# Altium PCB ValdisPCB.PcbDoc
Units mm, origin at the board's own origin, x right, y up, seen from the top; angles counter-clockwise.
Board outline 50 x 42.5 mm, 4 copper layers (Top Layer, GND top, GND bottom, Bottom Layer), stack 0.603 mm thick; 89 components, 68 nets, 308 pads, 111 vias.
Unrouted connection lines stored in the file: 12.
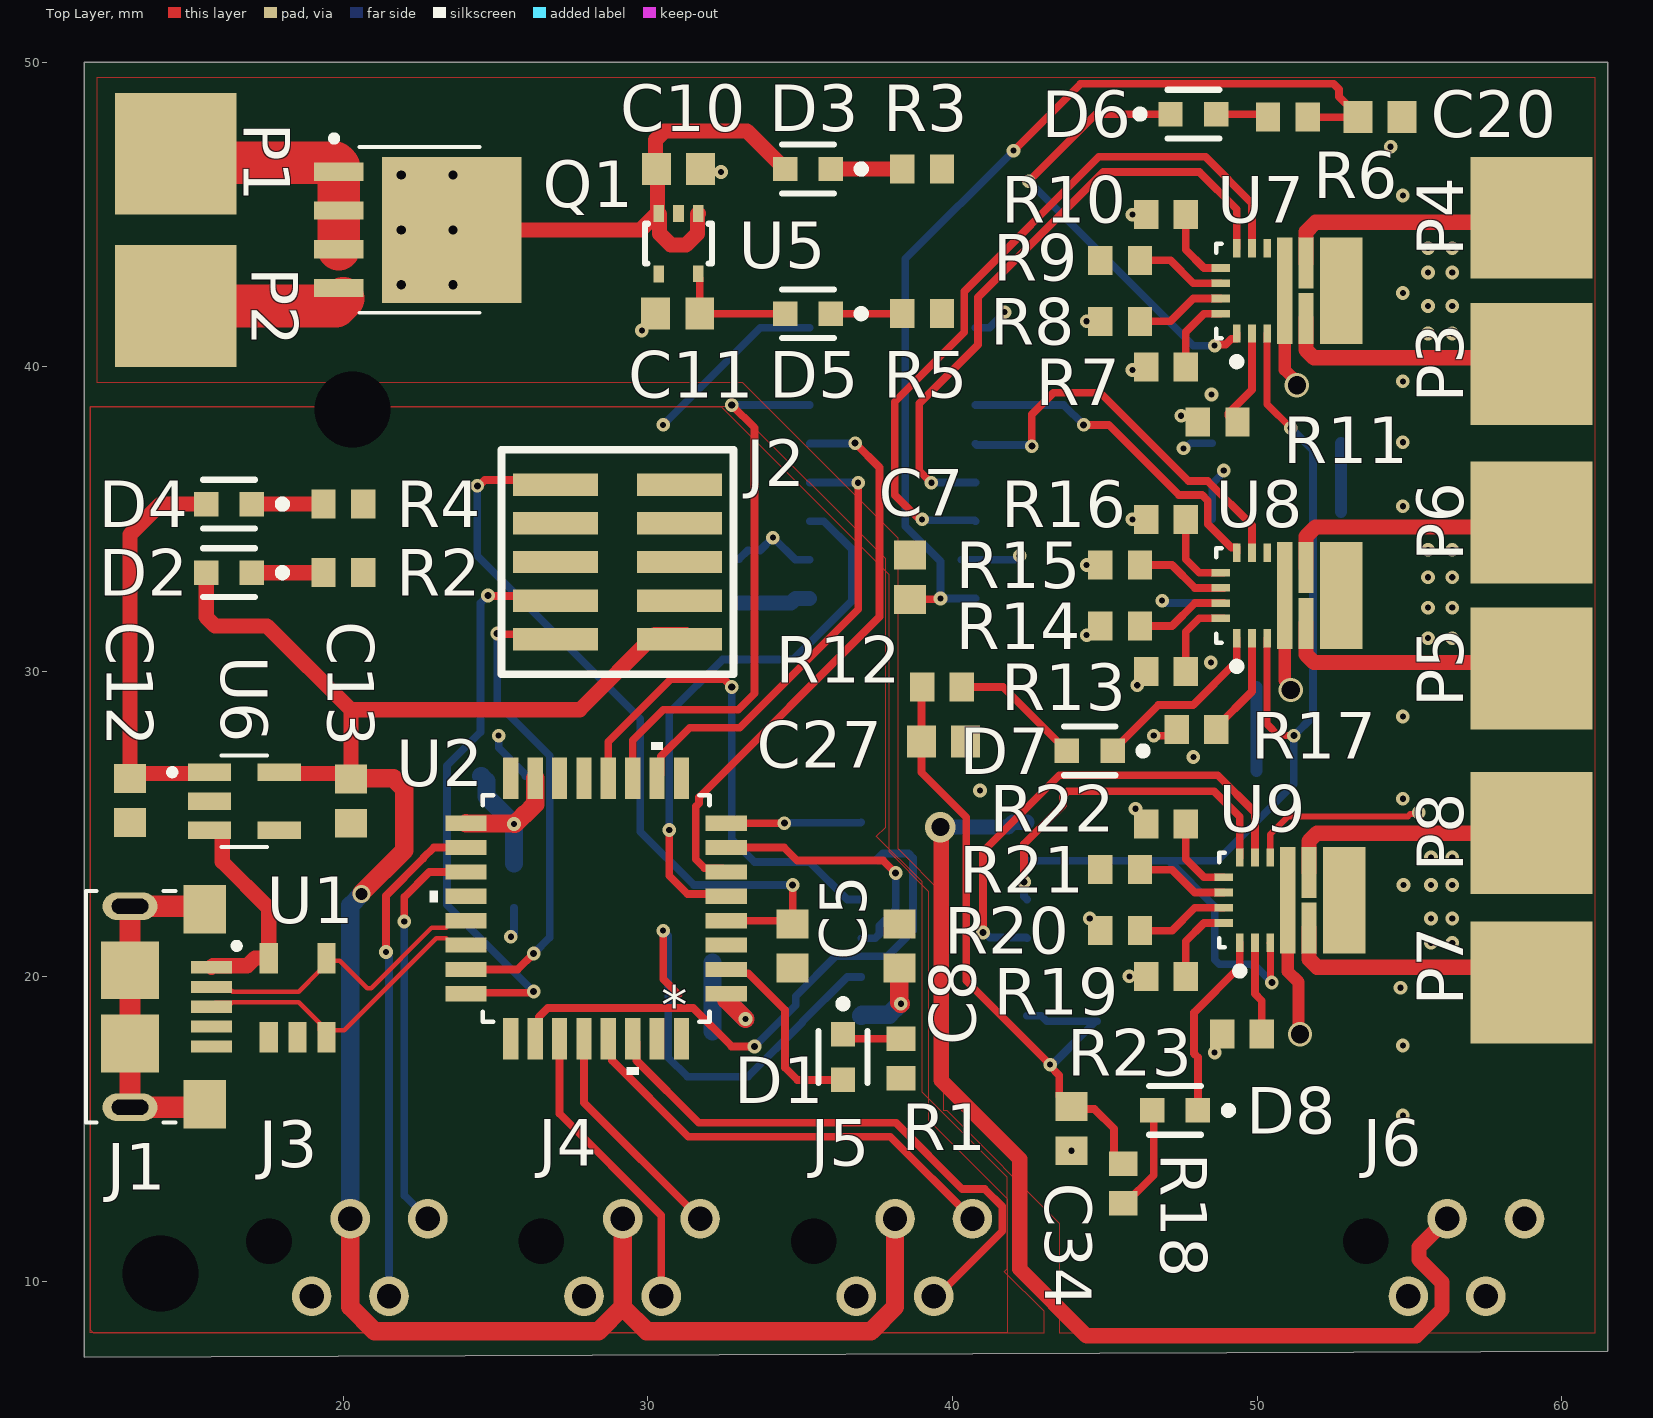
[diagram p0: Top Layer view]
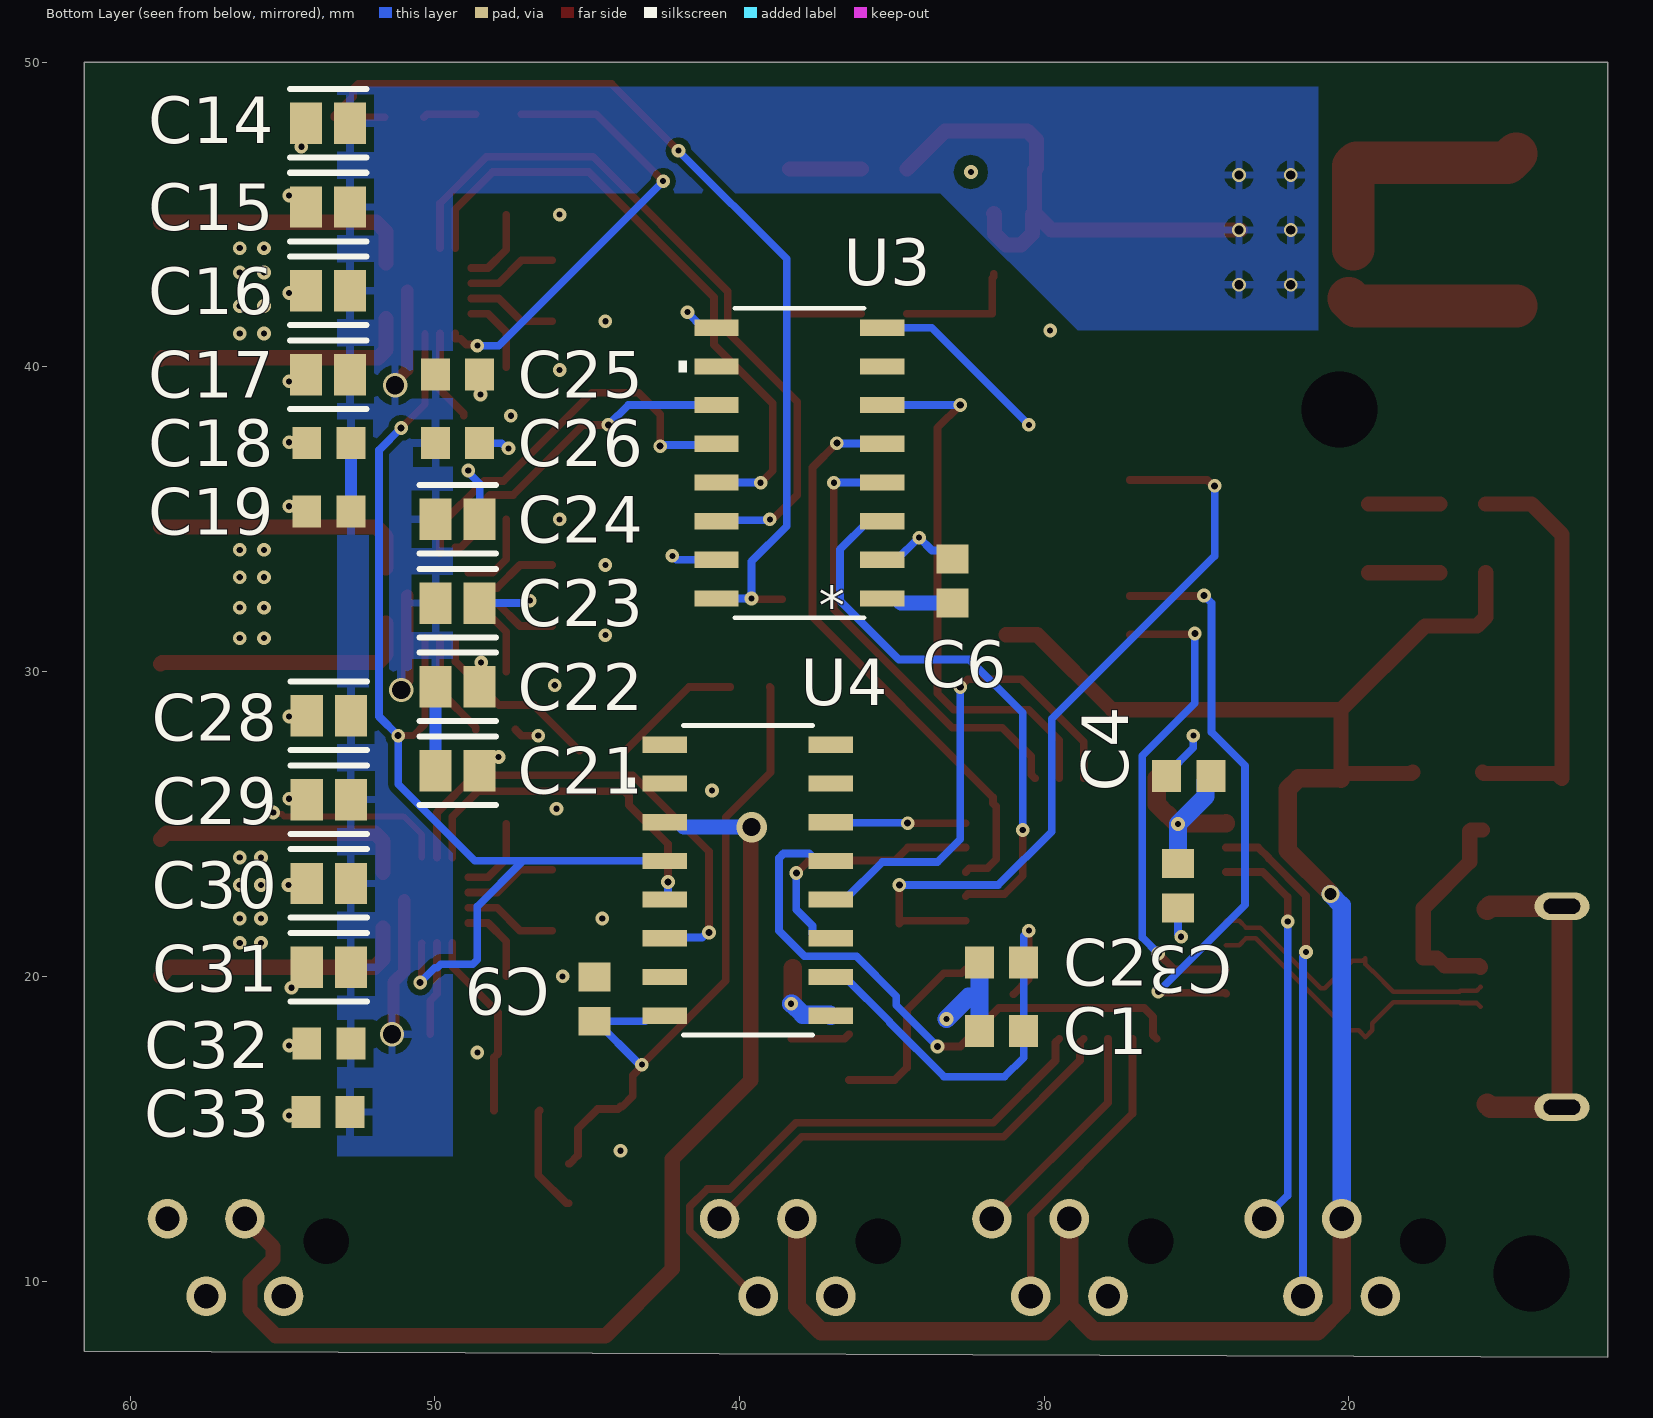
[diagram p1: Bottom Layer view, seen from below]
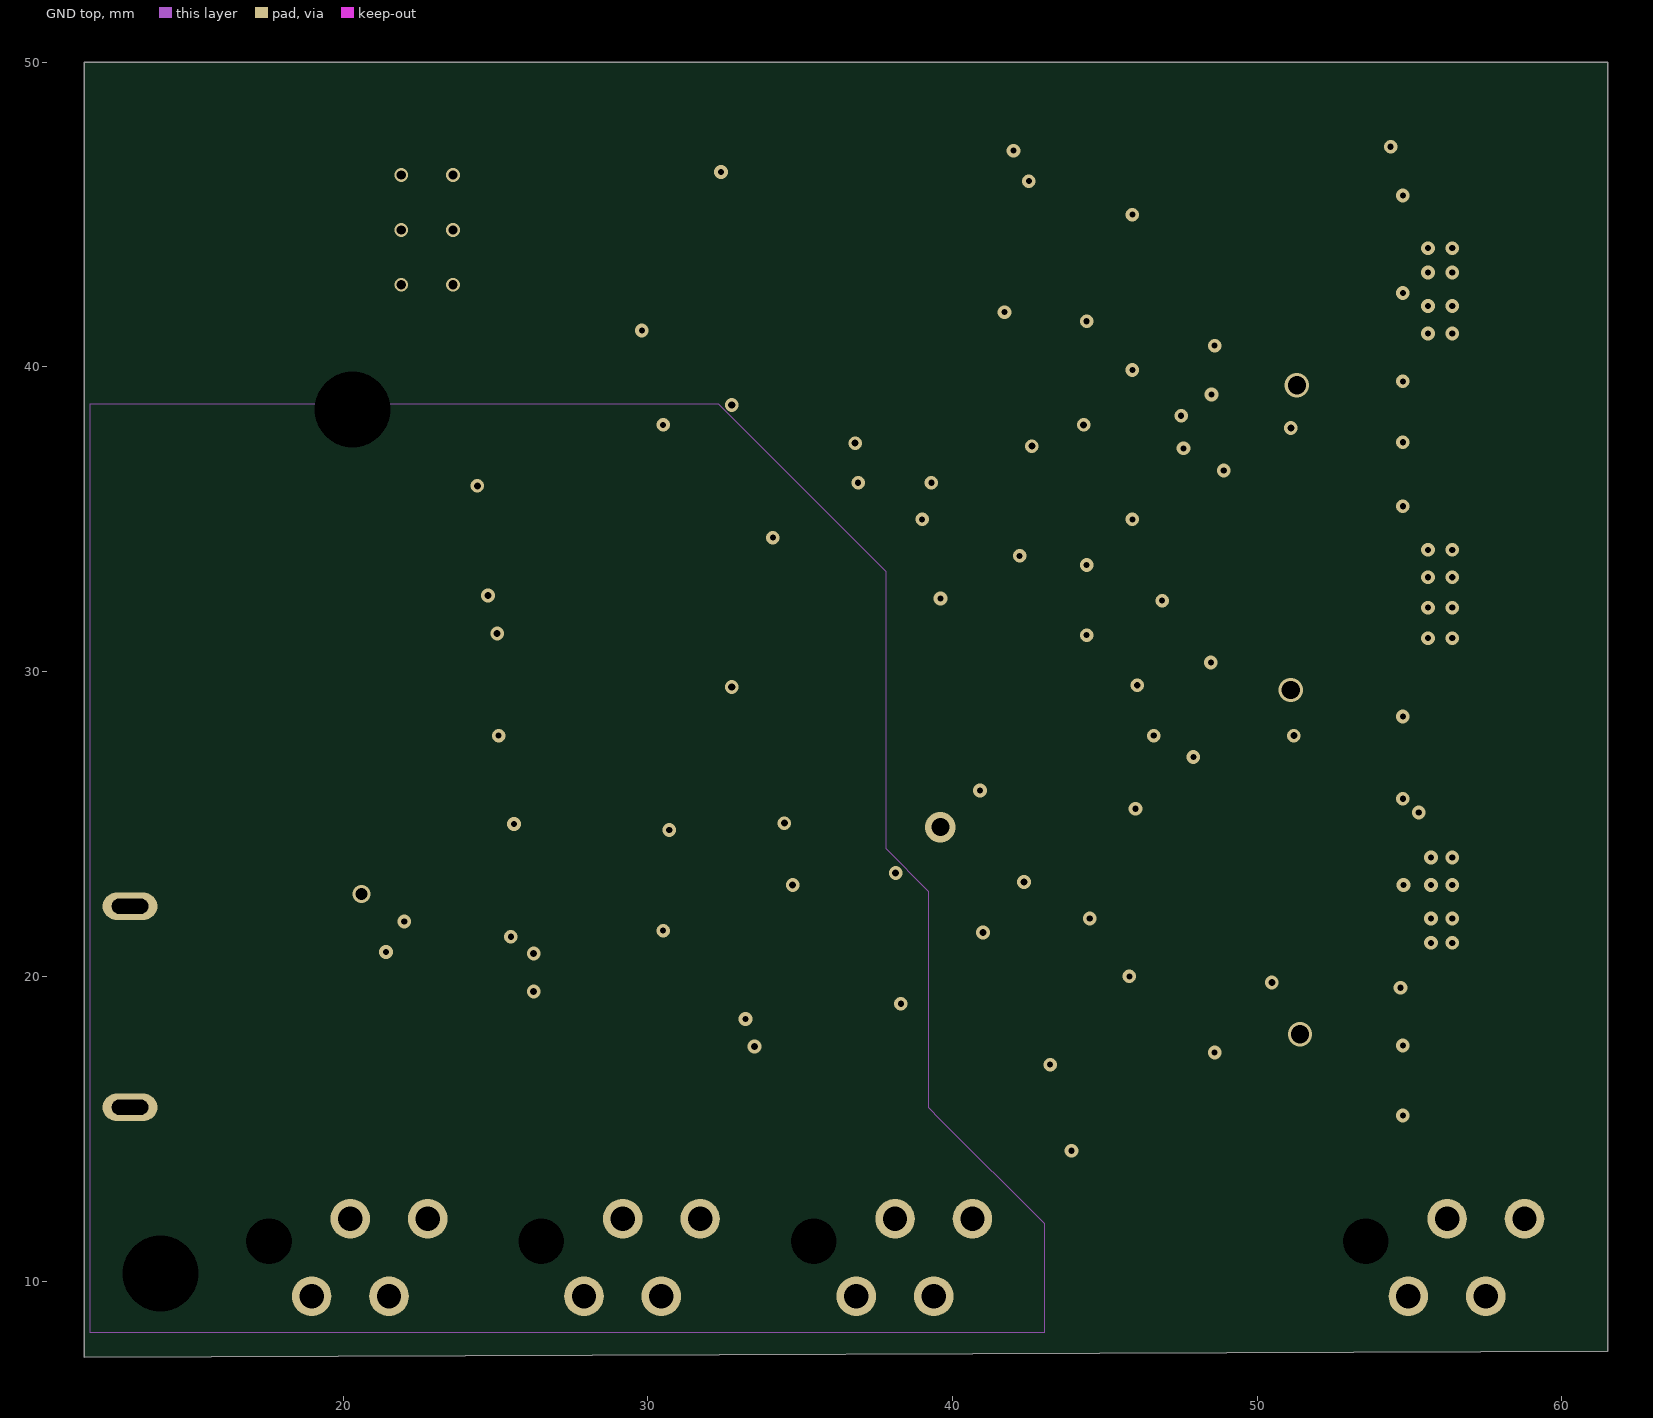
[diagram p2: GND top]
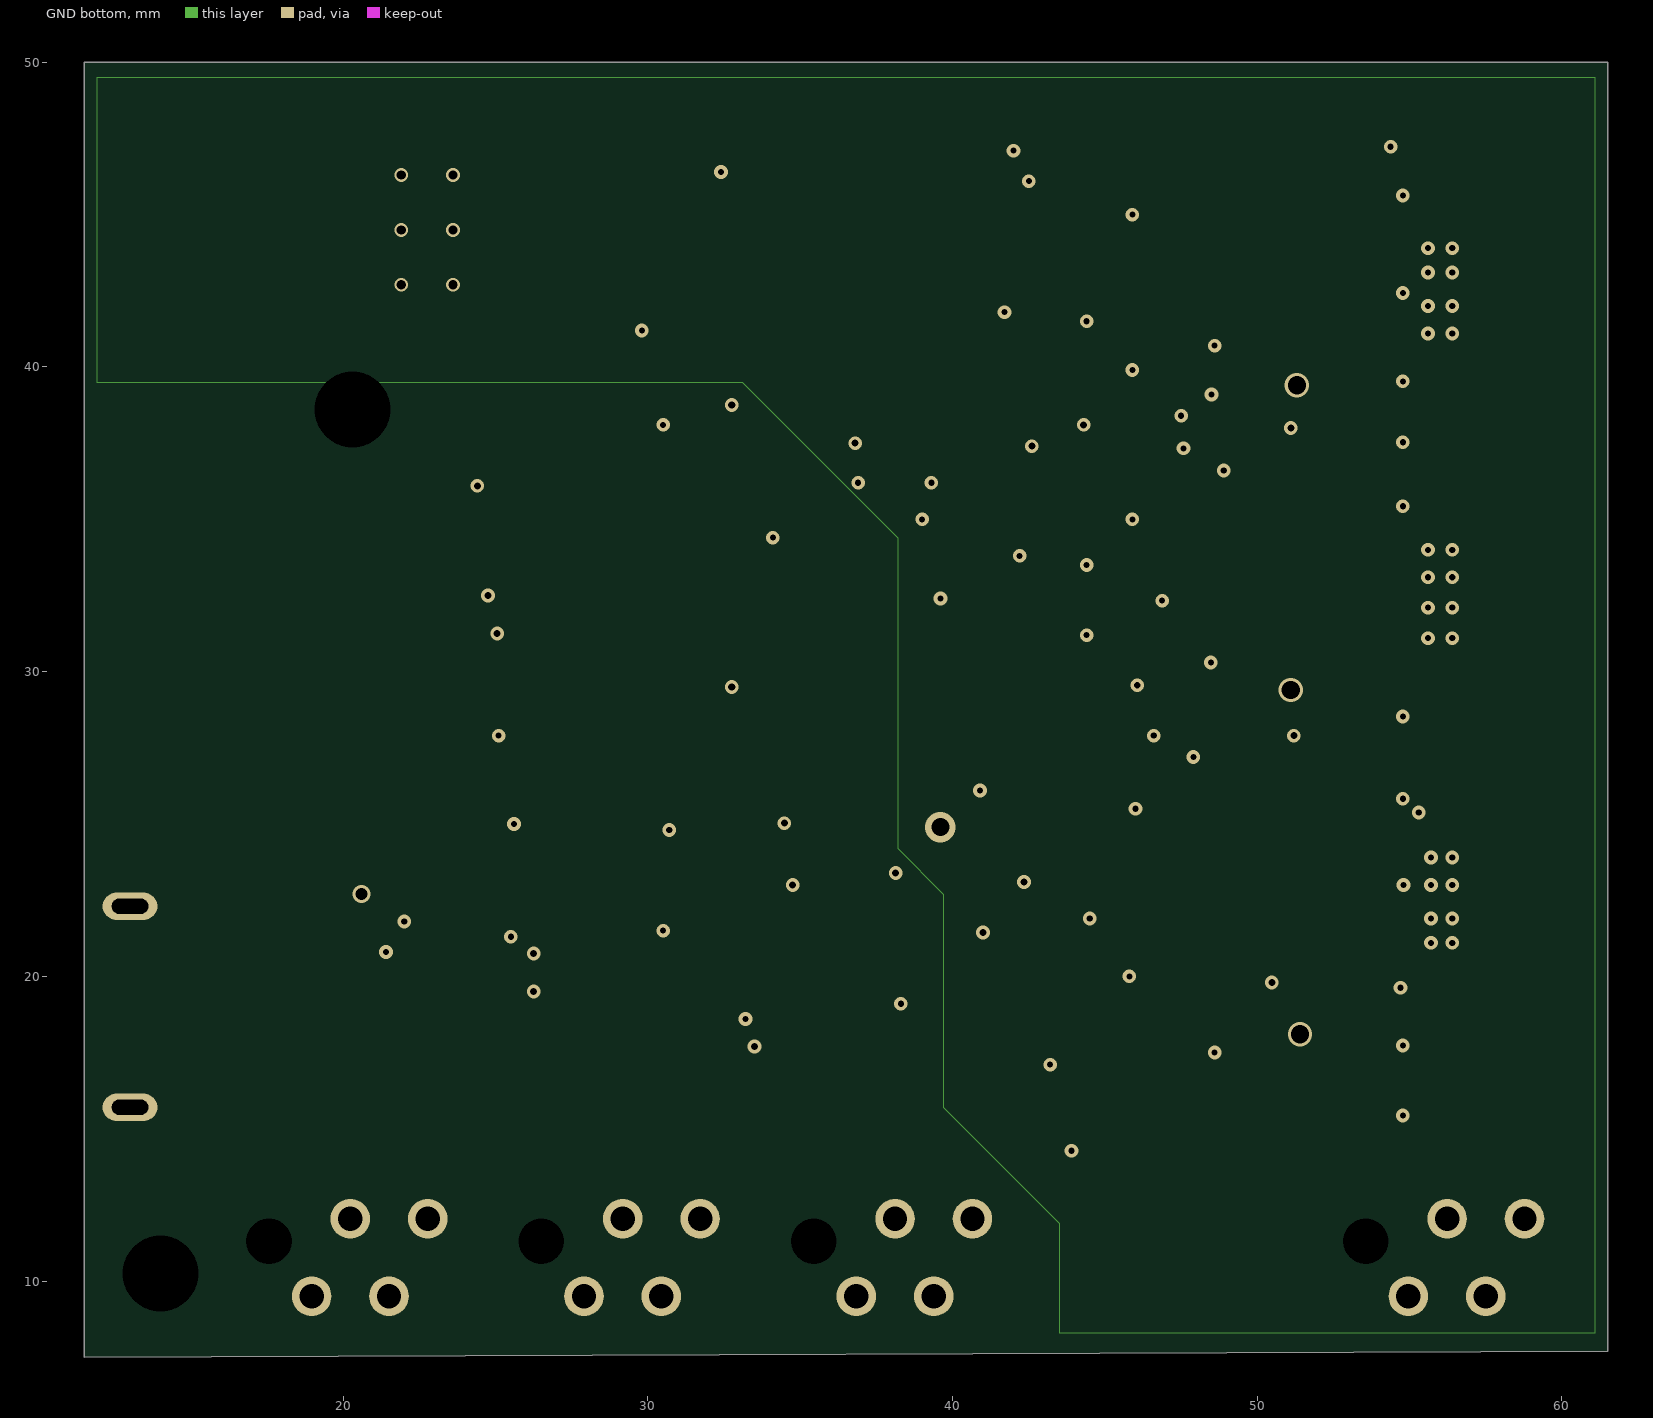
[diagram p3: GND bottom]
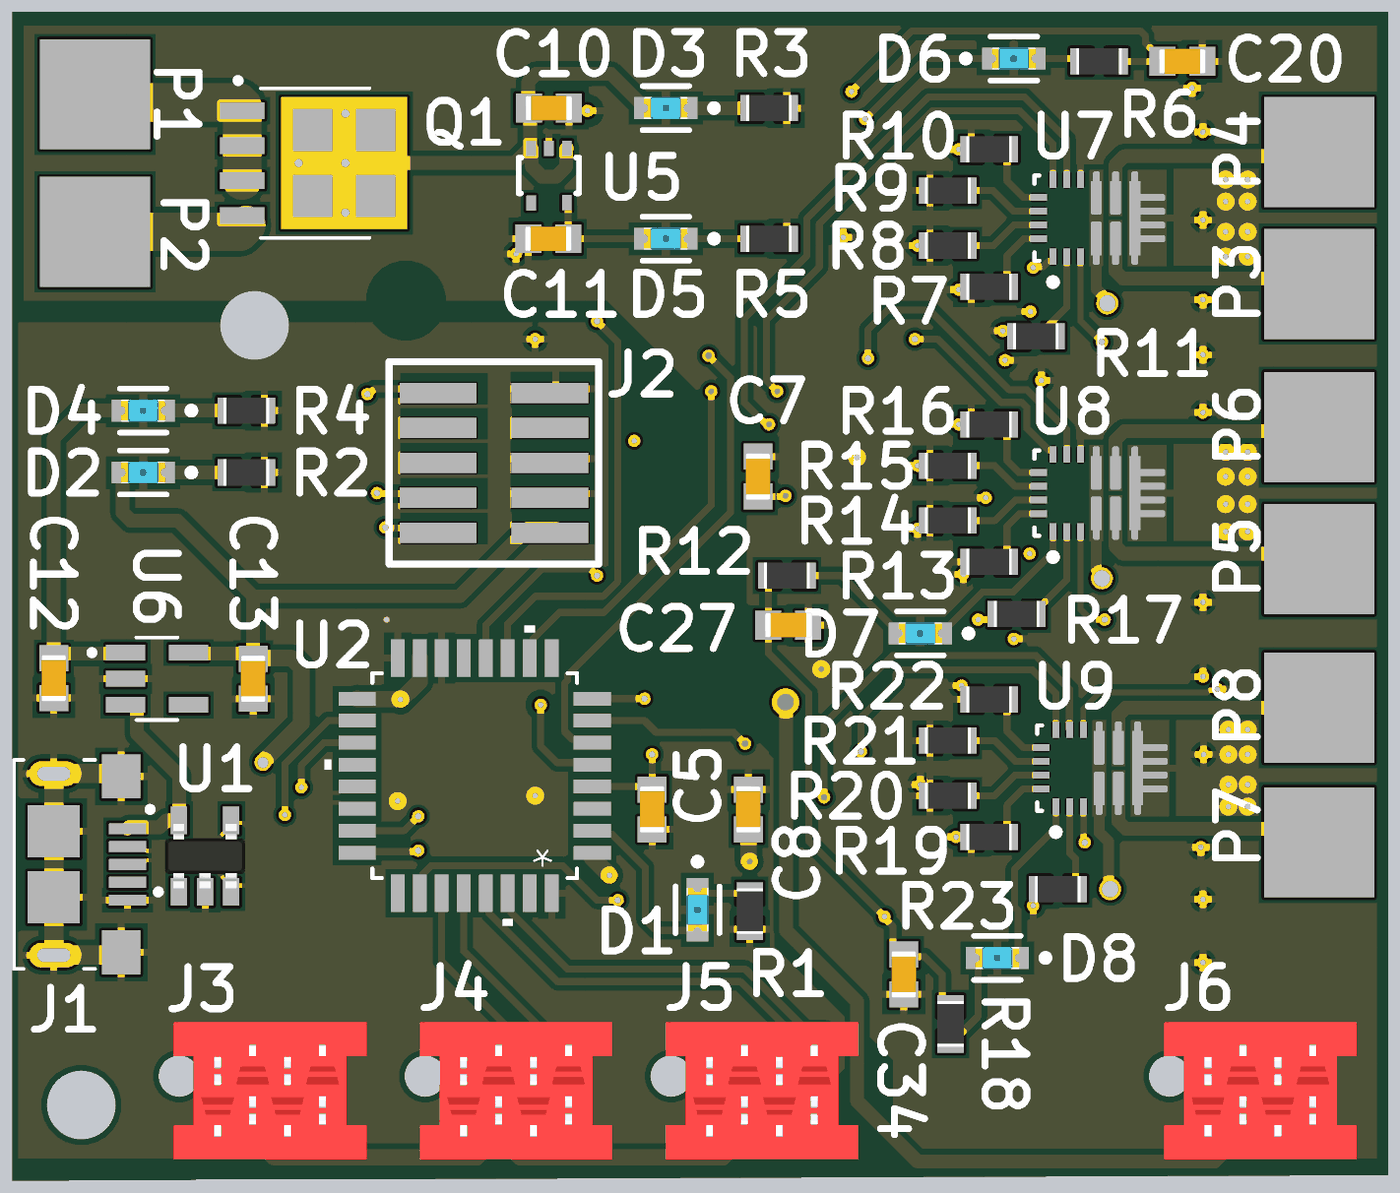
[diagram p4: 3D render of the assembled board from above, using the file's embedded part models]
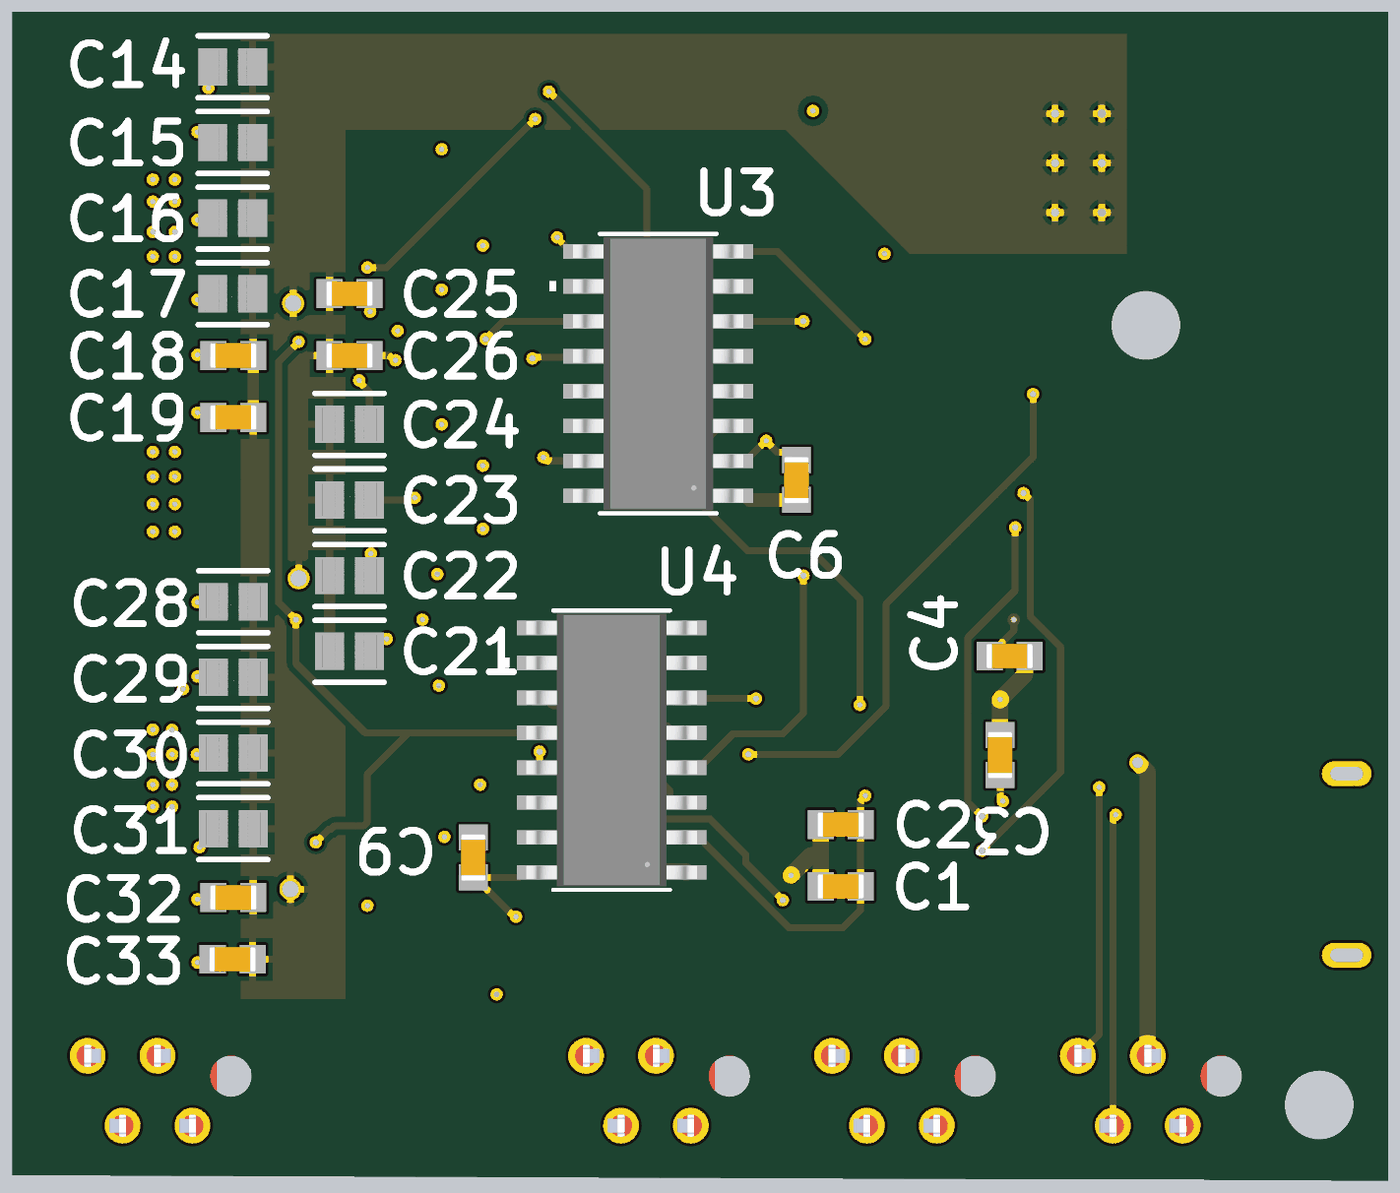
[diagram p5: 3D render of the assembled board from below, using the file's embedded part models]

## Layer stack, top to bottom
Top Solder: solder mask 0.0102, Solder Resist, Dk 3.5
Top Layer: signal copper 0.0356
Dielectric 2: prepreg 0.0711, PP-006, Dk 4.1
GND top: signal copper 0.035
Dielectric 1: dielectric 0.32, FR-4, Dk 4.8
GND bottom: signal copper 0.035
Dielectric 3: prepreg 0.0711, PP-006, Dk 4.1
Bottom Layer: signal copper 0.0356
Bottom Solder: solder mask 0.0102, Solder Resist, Dk 3.5

## Board outline
11.5,7.5 61.5,7.702 61.5,50 11.5,50

## Design rules (kind name [scope] priority, off if disabled: settings)
Clearance [All] p1: gap=0.2 ignorepadtopadclearanceinfootprint=TRUE
DiffPairsRouting "Schematic Differential Pairs Routing" [InDifferentialPairClass('USBA')] p1: maxlimit=0.2 minlimit=0.2 mostfreqgap=0.2 toplayer_minwidth=0.15 toplayer_maxwidth=0.15 toplayer_prefwidth=0.15 midlayer1_minwidth=0.15 midlayer1_maxwidth=0.15 midlayer1_prefwidth=0.15 midlayer2_minwidth=0.15 midlayer2_maxwidth=0.15 midlayer2_prefwidth=0.15 bottomlayer_minwidth=0.15 bottomlayer_maxwidth=0.15 bottomlayer_prefwidth=0.15 maxuncoupledlength=12.7
DiffPairsRouting [All] p2: maxlimit=0.254 minlimit=0.254 mostfreqgap=0.254 toplayer_minwidth=0.381 toplayer_maxwidth=0.381 toplayer_prefwidth=0.381 midlayer1_minwidth=0.381 midlayer1_maxwidth=0.381 midlayer1_prefwidth=0.381 midlayer2_minwidth=0.381 midlayer2_maxwidth=0.381 midlayer2_prefwidth=0.381 bottomlayer_minwidth=0.381 bottomlayer_maxwidth=0.381 bottomlayer_prefwidth=0.381 maxuncoupledlength=12.7
PolygonConnect [All] p1: connectstyle=Relief reliefconductorwidth=0.254 reliefentries=4 polygonreliefangle="90 Angle" airgapwidth=0.254
RoutingVias [All] p1: holewidth=0.711 width=1.27 viastyle="Through Hole" minholewidth=0.2 minwidth=0.3 maxholewidth=6.3 maxwidth=6.4
SolderMaskExpansion [All] p1: expansion=0.102 istentingtop=FALSE
Width [All] p1: maxlimit=2 minlimit=0.09 preferedwidth=0.254
29 further rules are at their usual default settings.

## Classes and differential pairs
differential pair class USBA: USB
component class MCU_3: C28 C29 C30 C31 C32 C33 C34 D8 R18 R19 R20 R21 R22 R23 U9
component class MCU_2: C21 C22 C23 C24 C25 C26 C27 D7 R12 R13 R14 R15 R16 R17 U8
component class MCU_1: C14 C15 C16 C17 C18 C19 C20 D6 R6 R7 R8 R9 R10 R11 U7
component class mainboard_valdis: C1 C2 C3 C4 C5 C6 C7 C8 C9 C10 C11 C12 C13 D1 D2 D3 D4 D5 J1 J2 J3 J4 J5 J6 P1 P2 P3 P4 P5 P6 P7 P8 Q1 R1 R2 R3 R4 R5 U1 U2 U3 U4 U5 U6
differential pair USB: +USB_P -USB_N

## Components (designator, comment, footprint, x,y, rotation, side; value= is the part's Value field where it differs from the comment)
C1 "4.7uF" CAPC1608X90X35ML10T15 31.394,18.201 r0 bottom
C2 "100nF" CAPC1608X90X35ML10T15 31.394,20.451 r0 bottom
C3 "100nF" CAPC1608X90X35ML10T15 25.6,22.975 r90 bottom
C4 "100nF" CAPC1608X90X35ML10T15 25.25,26.574 r180 bottom
C5 "100nF" CAPC1608X90X35ML10T15 34.75,21 r90 top
C6 "100nF" CAPC1608X90X35ML10T15 33,32.975 r270 bottom
C7 "100nF" CAPC1608X90X35ML10T15 38.6,33.1 r270 top
C8 "100nF" CAPC1608X90X35ML10T15 38.25,21 r270 top
C9 "100nF" CAPC1608X90X35ML10T15 44.75,19.25 r270 bottom
C10 "1uF" CAPC1608X90X35ML10T15 31,46.5 r180 top
C11 "1uF" CAPC1608X90X35ML10T15 30.975,41.75 r0 top
C12 "1uF" CAPC1608X90X35ML10T15 13,25.775 r90 top
C13 "1uF" CAPC1608X90X35ML10T15 20.25,25.75 r90 top
C14 "100uF" FP-CL21-IPC_C 53.5,48 r0 bottom
C15 "100uF" FP-CL21-IPC_C 53.5,45.25 r0 bottom
C16 "100uF" FP-CL21-IPC_C 53.5,42.5 r0 bottom
C17 "100uF" FP-CL21-IPC_C 53.5,39.75 r0 bottom
C18 "4.7uF" CAPC1608X90X35ML10T15 53.475,37.5 r180 bottom
C19 "100nF" CAPC1608X90X35ML10T15 53.475,35.25 r180 bottom
C20 "100nF" CAPC1608X90X35ML10T15 54.025,48.2 r180 top
C21 "100uF" FP-CL21-IPC_C 49.25,26.75 r180 bottom
C22 "100uF" FP-CL21-IPC_C 49.25,29.5 r180 bottom
C23 "100uF" FP-CL21-IPC_C 49.25,32.25 r180 bottom
C24 "100uF" FP-CL21-IPC_C 49.25,35 r180 bottom
C25 "4.7uF" CAPC1608X90X35ML10T15 49.25,39.75 r0 bottom
C26 "100nF" CAPC1608X90X35ML10T15 49.25,37.5 r0 bottom
C27 "100nF" CAPC1608X90X35ML10T15 39.7,27.7 r180 top
C28 "100uF" FP-CL21-IPC_C 53.475,28.55 r0 bottom
C29 "100uF" FP-CL21-IPC_C 53.475,25.8 r0 bottom
C30 "100uF" FP-CL21-IPC_C 53.475,23.05 r0 bottom
C31 "100uF" FP-CL21-IPC_C 53.475,20.3 r0 bottom
C32 "4.7uF" CAPC1608X90X35ML10T15 53.475,17.8 r180 bottom
C33 "100nF" CAPC1608X90X35ML10T15 53.5,15.55 r180 bottom
C34 "100nF" CAPC1608X90X35ML10T15 43.9,15 r90 top
D1 "LTST-C191TBKT" FP-LTST-C191TBKT-MFG 36.4,17.35 r270 top
D2 "LTST-C191TBKT" FP-LTST-C191TBKT-MFG 16.25,33.25 r180 top
D3 "LTST-C191TBKT" FP-LTST-C191TBKT-MFG 35.25,46.5 r180 top
D4 "LTST-C191TBKT" FP-LTST-C191TBKT-MFG 16.25,35.5 r180 top
D5 "LTST-C191TBKT" FP-LTST-C191TBKT-MFG 35.25,41.75 r180 top
D6 "LTST-C191TBKT" FP-LTST-C191TBKT-MFG 47.9,48.3 r0 top
D7 "LTST-C191TBKT" FP-LTST-C191TBKT-MFG 44.5,27.4 r180 top
D8 "LTST-C191TBKT" FP-LTST-C191TBKT-MFG 47.3,15.6 r180 top
J1 "10118193-0001LF" FCI_10118193-0001LF 13,19 r270 top
J2 "FTSH-105-01-L-DV-K" FTSH-105-01-XXX-DV-K 29,33.6 r90 top
J3 "microMatch4" microMatch4 18.96,9.5 r180 top
J4 "microMatch4" microMatch4 27.9,9.5 r180 top
J5 "microMatch4" microMatch4 36.84,9.5 r180 top
J6 "microMatch4" microMatch4 54.96,9.5 r180 top
P1 "BAT+" PCBComponent_1 14.5,47 r0 top
P2 "BAT-" PCBComponent_1 14.5,42 r0 top
P3 "M1+" PCBComponent_1 59,40.1 r0 top
P4 "M1-" PCBComponent_1 59,44.9 r0 top
P5 "M2+" PCBComponent_1 59,30.1 r0 top
P6 "M2-" PCBComponent_1 59,34.9 r0 top
P7 "M3+" PCBComponent_1 59,19.8 r0 top
P8 "M3-" PCBComponent_1 59,24.7 r0 top
Q1 "BUK6Y10-30PX" TO127P600X120-5N 22.5,44.5 r270 top
R1 "1K" RESC1609X50X30NL8T20 38.3,17.3 r90 top
R2 "1K" RESC1609X50X30NL8T20 20,33.25 r180 top
R3 "1K" RESC1609X50X30NL8T20 39,46.5 r180 top
R4 "1K" RESC1609X50X30NL8T20 20,35.5 r180 top
R5 "1K" RESC1609X50X30NL8T20 39,41.75 r180 top
R6 "1K" RESC1609X50X30NL8T20 51,48.2 r0 top
R7 "0" RESC1609X50X30NL8T20 47,40 r0 top
R8 "4K7" RESC1609X50X30NL8T20 45.5,41.5 r0 top
R9 "0" RESC1609X50X30NL8T20 45.5,43.5 r0 top
R10 "0" RESC1609X50X30NL8T20 47,45 r0 top
R11 "2K2" RESC1609X50X30NL8T20 48.7,38.2 r0 top
R12 "1K" RESC1609X50X30NL8T20 39.65,29.5 r180 top
R13 "0" RESC1609X50X30NL8T20 47,30 r0 top
R14 "4K7" RESC1609X50X30NL8T20 45.5,31.5 r0 top
R15 "0" RESC1609X50X30NL8T20 45.5,33.5 r0 top
R16 "0" RESC1609X50X30NL8T20 47,35 r0 top
R17 "2K2" RESC1609X50X30NL8T20 48,28.1 r0 top
R18 "1K" RESC1609X50X30NL8T20 45.6,13.2 r90 top
R19 "0" RESC1609X50X30NL8T20 47,20 r0 top
R20 "4K7" RESC1609X50X30NL8T20 45.5,21.5 r0 top
R21 "0" RESC1609X50X30NL8T20 45.5,23.5 r0 top
R22 "0" RESC1609X50X30NL8T20 47,25 r0 top
R23 "2K2" RESC1609X50X30NL8T20 49.5,18.1 r0 top
U1 "CM1223" SOT23-5 18.5,18 r0 top
U2 "STM32G441KBT3" LQFP32_7X7_STM 28.3,22.226 r180 top
U3 "MAX14930DASE+" 21-0041_S16+1_MXM 38.028,36.845 r0 bottom
U4 "MAX14930DASE+" 21-0041_S16+1_MXM 39.722,23.155 r0 bottom
U5 "NCV8730ASN500T1G" TSSOP5 31,44 r180 top
U6 "NCP164CSN330T1G" SOP95P275X110-5N 16.75,25.75 r0 top
U7 "PDRV8243HRXYQ1" RXY0014A-MFG 50.95,42.5 r90 top
U8 "PDRV8243HRXYQ1" RXY0014A-MFG 50.95,32.5 r90 top
U9 "PDRV8243HRXYQ1" RXY0014A-MFG 51.05,22.5 r90 top

## Footprints (in the part's own frame and the unit in brackets; to place one, negate y for a bottom-side part, rotate by r counter-clockwise, add the part's x,y. Pads: shape width x height; smd on the part's side, far side on the other; paste and mask are expansions set on the pad)
21-0041_S16+1_MXM [mm]
  rect 1.456x0.533 smd paste+0 mask+0: 1(-2.722,4.445) 2(-2.722,3.175) 3(-2.722,1.905) 4(-2.722,0.635) 5(-2.722,-0.635) 6(-2.722,-1.905) 7(-2.722,-3.175) 8(-2.722,-4.445) 9(2.722,-4.445) 10(2.722,-3.175) 11(2.722,-1.905) 12(2.722,-0.635) 13(2.722,0.635) 14(2.722,1.905) 15(2.722,3.175) 16(2.722,4.445)
  silkscreen extent -2.12,-5.08 3.96,5.08, body extent -3.1,-4.95 3.1,4.95, height 1.76
CAPC1608X90X35ML10T15 [mm] "Chip Capacitor, 2-Leads, Body 1.7x0.9mm, IPC Low Density"
  rect 0.95x1.05 smd: 1(-0.725,0) 2(0.725,0)
  body extent -0.85,-0.45 0.85,0.45, height 0.9
FCI_10118193-0001LF [mm]
  rect 0.4x1.35 smd: 1(-1.3,2.675) 2(-0.65,2.675) 3(0,2.675) 4(0.65,2.675) 5(1.3,2.675)
  rect 1.6x1.4 smd: S1(-3.2,2.45) S2(3.2,2.45)
  rect 1.9x1.9 smd: S3(1.2,0) S4(-1.2,0)
  oval 0.9x1.8 hole 0.5 slot 1.2 at 90 deg: S5(-3.3,0) S6(3.3,0)
  silkscreen extent -3.8,-1.45 3.8,3.6
FP-CL21-IPC_C [mm]
  rect 1.055x1.356 smd paste+0 mask+0: 1(-0.726,0) 2(0.726,0)
  silkscreen extent -1.25,-1.12 1.25,1.12, body extent -1,-0.63 1,0.63, height 1.45
FP-LTST-C191TBKT-MFG [mm]
  rect 0.8x0.8 smd paste+0 mask+0: 1(-0.75,0) 2(0.75,0)
  silkscreen extent -1.87,-0.8 0.85,0.8, body extent -1.25,-0.55 1.25,0.55, height 0.25
FTSH-105-01-XXX-DV-K [mil]
  rect 29x110 smd mask+2: 1(-100,-80) 2(-100,80) 3(-50,-80) 4(-50,80) 5(0,-80) 6(0,80) 7(50,-80) 8(50,80) 9(100,-80) 10(100,80)
  silkscreen extent -145,-150 145,150
LQFP32_7X7_STM [mm]
  rect 1.359x0.501 smd paste+0 mask+0: 1(-4.274,2.8) 2(-4.274,2) 3(-4.274,1.2) 4(-4.274,0.4) 5(-4.274,-0.4) 6(-4.274,-1.2) 7(-4.274,-2) 8(-4.274,-2.8) 17(4.274,-2.8) 18(4.274,-2) 19(4.274,-1.2) 20(4.274,-0.4) 21(4.274,0.4) 22(4.274,1.2) 23(4.274,2) 24(4.274,2.8)
  rect 0.501x1.359 smd paste+0 mask+0: 9(-2.8,-4.274) 10(-2,-4.274) 11(-1.2,-4.274) 12(-0.4,-4.274) 13(0.4,-4.274) 14(1.2,-4.274) 15(2,-4.274) 16(2.8,-4.274) 25(2.8,4.274) 26(2,4.274) 27(1.2,4.274) 28(0.4,4.274) 29(-0.4,4.274) 30(-1.2,4.274) 31(-2,4.274) 32(-2.8,4.274)
  silkscreen extent -3.72,-5.46 5.46,5.46, body extent 0,0 0.25,0.25, height 0.25
microMatch4 [mm]
  round 1.3 hole 0.8: 1(0,0) 2(-1.27,-2.54) 3(-2.54,0) 4(-3.81,-2.54)
  round 0 hole 1.5 unplated: drill(1.4,-1.8)
  body extent -5.41,-3.77 1.6,1.23, height 4
PCBComponent_1 [mm]
  rect 4x4 smd: 1(0,0)
RESC1609X50X30NL8T20 [mm] "Chip Resistor, 2-Leads, Body 1.65x0.95mm, IPC Medium Density"
  rect 0.8x0.95 smd: 1(-0.65,0) 2(0.65,0)
  body extent -0.82,-0.48 0.82,0.48, height 0.5
RXY0014A-MFG [mm]
  rect 0.6x0.25 smd paste+0 mask-0.292: 1(-1.4,1.625) 2(-1.4,1.125) 3(-1.4,0.625) 8(1.4,0.625) 9(1.4,1.125) 10(1.4,1.625)
  rect 3.5x0.5 smd paste-1.737 mask-1.74: 4(0,0.05)
  rect 1.675x0.5 smd paste-0.825 mask-0.826: 5(-0.913,-0.65) 7(0.913,-0.65)
  rect 3.5x1.4 smd paste-1.737 mask-1.74: 6(0,-1.8)
  rect 0.25x0.6 smd paste+0 mask-0.292: 11(0.75,2.15) 12(0.25,2.15) 13(-0.25,2.15) 14(-0.75,2.15)
  silkscreen extent -2.45,1.5 1.55,2.3, body extent 0,0 0.25,0.25, height 0.25
SOP95P275X110-5N [mm]
  rect 1.42x0.58 smd: 1(-1.145,0.95) 2(-1.145,0) 3(-1.145,-0.95) 4(1.145,-0.95) 5(1.145,0.95)
  silkscreen extent -2.46,-1.5 0.75,1.5
SOT23-5 [mm] "SOT143-4 as used in SP0503BAHTG"
  round 0.4 on Top Overlay: 1(-1.7,0)
  rect 0.6x1 smd: 1(-0.95,0) 2(0,0) 3(0.95,0) 4(0.95,2.6) 5(-0.95,2.6)
  body extent -1.46,0.13 1.46,2.47, height 1
TO127P600X120-5N [mm]
  rect 0.6x1.62 smd: 1(-1.905,-2.65) 2(-0.635,-2.65) 3(0.635,-2.65) 4(1.905,-2.65)
  rect 4.8x4.58 smd paste-3: 5(0,1.06)
  silkscreen extent -3.1,-2.9 2.72,1.97
TSSOP5 [mm]
  rect 0.35x0.55 smd: 1(-0.65,-1.04) 2(0,-1.04) 3(0.65,-1.04) 4(0.65,0.95) 5(-0.65,0.94)
  silkscreen extent -1.1,-0.7 1.1,0.6

## Part data
C1 C2 C3 C4 C5 C6 C7 C8 C9 C10 C11 C12 C13 C18 C19 C20 C25 C26 C27 C32 C33 C34: library part CMP-2000-04945-1, "Chip Capacitor, 22 pF, +/- 5%, 50 V, -55 to 125 degC, 0603 (1608 Metric), RoHS, Tape and Reel", Capacitance=22pF, Case Size/Dimension=0603, Dielectric=C0G, MANUFACTURER=Murata, Package Description="2-Pin Surface Mount Device, Body 1.6 x 0.8 mm", Package Reference=603, Rated Voltage=50V, Tolerance (%)=±5%, Datasheet URL=https://datasheet.ciiva.com/11786/0900766b807a1cab-11786398.pdf, Datasheet Version=Jul-06, Manufacturer URL=http://www.murata.com/
C14 C15 C16 C17 C21 C22 C23 C24 C28 C29 C30 C31: library part CMP-13271-003225-1, "CL21 Series 0805 22uF 25V ±20% Tolerance X5R Multilayer Ceramic Chip Capacitor"
D1 D2 D3 D4 D5 D6 D7 D8: library part CMP-22017-000008-1, "LED BLUE CLEAR CHIP SMD", Case Code (Imperial)=0603, Case Code (Metric)=1608, Color=Blue, Forward Current=20mA, Forward Voltage=3.8V, Lens Color=Colorless, Max Operating Temperature=80°C, Max Power Dissipation=75mW, Min Operating Temperature=-20°C, Package Quantity=1, Power Dissipation=76mW, Reverse Voltage=5V, Case/Package=0603, Depth=1.6mm, Dominant Wavelength=475nm, Height=0.55mm, Illumination Color=Blue, Lead Free="Lead Free", Length=0.8mm, Lens Style=Diffused, Lens Transparency=Clear, Luminous Intensity=180mcd, Mount="Surface Mount", Number of Elements=1, Number of LEDs=1, Number of Pins=2, Packaging="Tape and Reel", Radiation Hardening=No, Test Current=20mA, Viewing Angle=130°, Wavelength=468nm, Width=0.8mm
J1: "USB - micro B USB 2.0 Receptacle Connector 5 Position Surface Mount, Right Angle; Through Hole", Package=None, Availability=Unavailable, MF="Amphenol ICC", MP=10118193-0001LF, Price=None, SnapEDA_Link=https://www.snapeda.com/parts/10118193-0001LF/Amphenol%20FCI/view-part/2758989/?ref=snap
P1 P2 P3 P4 P5 P6 P7 P8: library part Pad4x4
R1 R2 R3 R4 R5 R6 R7 R8 R9 R10 R11 R12 R13 R14 R15 R16 R17 R18 R19 R20 R21 R22 R23: library part CMP-2000-03816-5, "Chip Resistor, 0 Ohm, Jumper, 100 mW, -55 to 155 degC, 0603 (1608 Metric), RoHS, Tape and Reel", MANUFACTURER="Vishay Semiconductor", Max Operating Temperature="155 degC", Min Operating Temperature="-55 degC", Package Quantity=5000, Voltage Rating="75 V", ComponentLink1Description="Manufacturer URL", ComponentLink1URL=http://www.vishay.com/, ComponentLink2Description=Datasheet, ComponentLink2URL=http://www.vishay.com/docs/20035/dcrcwe3.pdf, DatasheetVersion=06/2012, Height="0.45 mm", Length="1.55 mm", Mount="Surface Mount", Mounting Technology="Surface Mount", PackageDescription="2-Pin Surface Mount Device, Body 1.575 x 0.85 mm", PackageReference=0603, Packaging="Tape and Reel", Pins=2, REACH SVHC=Unknown, RoHSCompliant=true
U2: "No Description Available", Built_By=EMA_Cory, Copyright="Copyright (C) 2018 Accelerated Designs. All rights reserved", Datasheet=https://www.st.com/resource/en/datasheet/stm32g441kb.pdf, Manufacturer_Part_Number=STM32G441KBT3, RefDes=RefDes, SourceLibrary=Add_to_database_2020-11-05, Type=DEV, Vendor=STMicroelectronics
U7 U8 U9: "No Description Available", Mfr_Name="Texas Instruments", Copyright="Copyright (C) 2022 Ultra Librarian. All rights reserved.", Manufacturer_Part_Number=PDRV8243HRXYQ1, RefDes=RefDes, Type=DEV

## Free pads (board coordinates)
  round 0 hole 2.5 unplated: HOLE(14,10.25) HOLE(20.3,38.6)

## Via types
v1: diameter 0.45, hole 0.2, Top Layer to Bottom Layer, 80 vias
v2: diameter 0.45, hole 0.23, Top Layer to Bottom Layer, 19 vias
v3: diameter 0.45, hole 0.3, Top Layer to Bottom Layer, 6 vias
v4: diameter 0.8, hole 0.6, Top Layer to Bottom Layer, 3 vias
v5: diameter 0.45, hole 0.2, Top Layer to Bottom Layer, tented both sides, 1 vias
v6: diameter 1, hole 0.6, Top Layer to Bottom Layer, 1 vias
v7: diameter 0.6, hole 0.4, Top Layer to Bottom Layer, 1 vias

## Nets (pads, with @x,y where several pads share a name; then routed paths per layer and width w, separated by ;. In a path a pad name is that pad's centre, name@x,y a point inside that pad or via, vN(x,y) a via of type N, cw(c..) or ccw(c..) an arc to the next point about the centre after c; other vN are vias at no path point)
+3.3V: C1.2 C2.2 C3.2 C4.2 C6.2 C8.2 C13.2 D2.2 J2.1 J3.2 J4.2 J5.2 U2.1 U2.15 U2.17 U3.1 U4.1 U6.5 | length 85.3
  Top Layer w0.5: D2.2 15.5,31.793 15.793,31.5 17.5,31.5 20.25,28.75 ; U6.5 17.935,26.66 20.065,26.66 C13.2 20.25,28.75 ; J2.1@31.25,31.21 30.221,31.21 27.761,28.75 20.25,28.75
  Top Layer w0.6: J3.2@20.23,12.229 J3.2 20.23,9.144 21.024,8.35 28.376,8.35 29.17,9.144 ; C13.2 20.275,26.5 21.649,26.5 22,26.149 22,24.13 v7@20.6,22.73 ; U2.17 24.04,25.013 25.587,25.013 v1(25.6,25) 25.627,25 25.927,25.3 25.949,25.3 26.3,25.651 U2.15 ; J4.2 29.17,9.144 ; U2.1@32.574,19.226 v1(33.2,18.6) ; J5.2 38.11,9.144 37.316,8.35 29.964,8.35 29.17,9.144 ; C8.2 38.25,19.15 v1(38.3,19.1)
  Bottom Layer w0.5: C6.2 34.694,32.25 34.844,32.4 U3.1
  Bottom Layer w0.6: J3.2 20.23,22.33 v7(20.6,22.7) ; C4.2 24.7,26.399 24.7,25.9 v1(25.6,25) C3.2 ; C1.2 32.119,19.326 ; C2.2 32.119,19.326 ; v1(33.2,18.6) 32.474,19.326 32.119,19.326 ; U4.1 37.034,18.744 37.917,18.744 38.273,19.1 v1(38.3,19.1)
+5: C7.2 C9.2 C11.2 C20.2 C27.2 C34.2 D5.2 R6.2 R12.2 R18.2 U3.16 U4.16 U5.5 | length 60.8
  Top Layer w0.254: U5.5 31.65,42.96 31.7,42.91 C11.2 D5.2 ; C7.2 39.575,32.375 v1(39.6,32.4) ; R12.2 38.975,29.475 C27.2 38.975,26.695 40.448,25.222 40.448,19.852 v1(43.2,17.1) 43.2,17.047 43.502,16.745 43.502,16.073 43.85,15.725 C34.2 43.982,15.643 44.657,15.643 45.3,15 45.3,14.123 45.573,13.85 R18.2 ; v1(42,47.1) 44.2,49.3 52.5,49.3 52.68,49.12 52.68,48.87 53.3,48.25 C20.2 R6.2
  Bottom Layer w0.254: U3.16 v1(39.6,32.4) 39.6,33.619 38.448,34.771 38.448,43.548 v1(42,47.1) ; U4.16 42.906,18.71 43.091,18.525 C9.2@44.7,18.525 ; v1(43.2,17.1) 43.238,17.138 43.313,17.138 C9.2@44.7,18.525 ; C9.2 C9.2@44.7,18.525
+5VA: C12.2 D4.2 J1.1 U1.5 U6.1 U6.3 | length 20.8
  Top Layer w0.5: D4.2 14,35.5 13,34.5 C12.2 13.16,26.66 15.565,26.66 U6.1 ; U6.3 15.986,24.8 16.026,24.76 16.026,23.76 17.55,22.236 U1.5 17.1,20.6 16.85,20.35 15.725,20.35 J1.1
+16V: C10.2 C14.1 C15.1 C16.1 C17.1 C18.2 C19.2 C21.1 C22.1 C23.1 C24.1 C25.2 C26.2 C28.1 C29.1 C30.1 C31.1 C32.2 C33.2 D3.2 Q1.5 U5.1 U5.3 U7.4 U8.4 U9.4 | length 33.2
  Top Layer w0.4: U8.4 50.9,29.708 51.1,29.508 v4(51.1,29.4) ; U7.4 50.9,39.908 51.3,39.508 v4(51.3,39.4) ; U9.4 51,20.161 51.35,19.811 51.35,18.15 v4(51.4,18.1)
  Top Layer w0.5: Q1.5 29.76,44.5 U5.3@30.3,45.04 ; U5.3@30.312,45.065 30.312,46.463 C10.2 30.25,46.525 30.25,47.457 30.543,47.75 33.25,47.75 D3.2 ; U5.3@30.375,45.015 30.375,44.375 30.75,44 31.25,44 31.625,44.375 31.625,45.015 U5.1
  Bottom Layer w0.4: C21.1 C22.1 ; C19.2 C18.2
  other v3: 21.9,42.7 23.6,42.7 21.9,44.5 23.6,44.5 21.9,46.3 23.6,46.3
GND: C1.1 C2.1 C3.1 C4.1 C5.1 C6.1 C8.1 C12.1 C13.1 J1.5 J1.S1 J1.S2 J1.S3 J1.S4 J1.S5 J1.S6 J2.3 J2.5 J2.9 J3.1 J4.1 J5.1 R1.1 R2.1 R4.1 U1.2 U2.14 U2.16 U2.32 U3.2 U3.8 U4.2 U4.8 U6.2 | length 37.8
  Top Layer w0.254: v1(30.5,21.5) 30.5,19.913 31,19.413
  Top Layer w0.7: J1.S2 15.35,15.7 J1.S6 J1.S3 J1.S4 J1.S5 15.35,22.3 J1.S1
  Bottom Layer w0.254: v5(25.1,27.9) 25.1,27.499 25.975,26.624 C4.1 ; v1(25.5,21.3) 25.6,21.4 C3.1 ; v1(30.5,21.5) 30.669,21.331 C2.1 C1.1 30.669,17.331 31.3,16.7 33.281,16.7 35.064,18.483 35.064,18.506 36.538,19.98 U4.2 ; v1(30.5,38.1) 33.69,41.29 U3.8 ; C6.1 33.278,33.978 33.678,33.978 v1(34.1,34.4) 34.114,34.4 34.844,33.67 U3.2
GNDB: C7.1 C9.1 C10.1 C11.1 C14.2 C15.2 C16.2 C17.2 C18.1 C19.1 C20.1 C21.2 C22.2 C23.2 C24.2 C25.1 C26.1 C27.1 C28.2 C29.2 C30.2 C31.2 C32.1 C33.1 C34.1 J6.1 R3.1 R5.1 R7.1 R8.1 R9.1 R10.1 R11.1 R13.1 R14.1 R15.1 R16.1 R17.1 R19.1 R20.1 R21.1 R22.1 R23.1 U3.9 U3.15 U4.9 U4.15 U5.2 U7.6 U7.8 U8.6 U8.8 U9.6 U9.8 | length 14.4
  Top Layer w0.2: U9.8 50.425,24.657 51.018,25.25 54.94,25.25 55.018,25.327 55.252,25.327 v1(55.3,25.375)
  Top Layer w0.254: v1(46.6,27.9) 47.15,27.9 R17.1
  Bottom Layer w0.254: U3.15@40.288,33.67 U3.15 42.07,33.67 v1(42.2,33.8) ; U3.9 41.212,41.29 41.7,41.778 v1(41.7,41.8) ; v1(46.878,32.33) 46.931,32.33 47.012,32.25 C23.2 ; v1(47.578,37.33) 47.631,37.33 47.801,37.5 C26.1 ; C24.2 48.524,36.171 48.9,36.547 v1(48.9,36.6)
  other v1: 43.9,14.275 54.778,15.43 48.6,17.5 54.778,17.73 54.7,19.625 45.8,20 55.7,21.1 56.4,21.1 44.5,21.9 55.7,21.9 56.4,21.9 54.8,23 55.7,23 56.4,23 55.7,23.9 56.4,23.9 46,25.5 54.778,25.83 40.9,26.1 47.9,27.2 54.778,28.53 46.061,29.553 48.475,30.3 55.6,31.1 56.4,31.1 44.4,31.2 55.6,32.1 56.4,32.1 55.6,33.1 56.4,33.1 44.4,33.5 55.6,34 56.4,34 45.9,35 54.778,35.43 54.778,37.53 47.5,38.4 48.5,39.1 54.778,39.53 45.9,39.9 55.6,41.1 56.4,41.1 29.8,41.2 44.4,41.5 55.6,42 56.4,42 54.778,42.43 55.6,43.1 56.4,43.1 55.6,43.9 56.4,43.9 45.9,45 54.778,45.63 32.4,46.4 54.378,47.23
M1_DIR_A: U2.10 U3.4 | length 15
  Top Layer w0.254: U2.10 30.423,26.623 30.423,27.216 31.368,28.16 33.01,28.16 36.9,32.051 v1(36.9,36.2)
  Bottom Layer w0.254: U3.4 35.311,36.205 36.895,36.205 v1(36.9,36.2)
M1_DIR_B: U3.13 U7.10 | length 20.5
  Top Layer w0.254: v1(39.3,36.2) 38.9,36.6 38.9,38.8 40.831,40.731 40.831,42.289 44.942,46.4 48.1,46.4 49.325,45.175 U7.10
  Bottom Layer w0.254: v1(39.3,36.2) 39.305,36.205 40.745,36.205 U3.13
M1_ENC_A: J3.3 U2.18 | length 16.8
  Top Layer w0.254: J3.3@21.3,9.7 J3.3 ; v1(21.4,20.8) 21.4,22.643 22.627,23.87 22.627,23.887 22.966,24.226 U2.18
  Bottom Layer w0.254: v1(21.4,20.8) 21.4,20.747 21.5,20.647 J3.3
M1_ENC_B: J3.4 U2.19 | length 13.2
  Top Layer w0.254: v1(22,21.8) 22,22.601 22.825,23.426 U2.19
  Bottom Layer w0.254: v1(22,21.8) 22,12.81 J3.4
M1_PWM_A: U2.5 U3.3 | length 18.5
  Top Layer w0.254: v1(30.7,24.8) 30.7,23.3 31.3,22.7 32.5,22.7 U2.5
  Bottom Layer w0.254: v1(30.7,24.8) 30.7,28.651 32.449,30.4 34.763,30.4 36.7,32.337 36.7,34.008 35.768,34.94 U3.3
M1_PWM_B: U3.14 U7.9 | length 24
  Top Layer w0.254: v1(39,35) 38.9,35 38.1,35.8 38.1,38.863 40.377,41.14 40.377,42.477 44.8,46.9 48.3,46.9 49.823,45.377 49.823,43.902 U7.9
  Bottom Layer w0.254: v1(39,35) 39.03,34.97 40.72,34.97 U3.14
M2_DIR_A: U2.11 U3.6 | length 18.2
  Top Layer w0.254: U2.11 29.5,27.75 30.5,28.75 32.957,28.75 33.5,29.293 33.5,38 v2(32.75,38.75)
  Bottom Layer w0.254: v2(32.75,38.75) U3.6
M2_DIR_B: U3.11 U8.10 | length 11.1
  Top Layer w0.254: v2(44.3,38.1) 45.125,38.1 47.423,35.802 47.556,35.802 48.185,35.802 48.377,35.61 48.377,34.981 48.377,34.848 49.152,34.073 49.323,34.073 49.325,34.071 U8.10
  Bottom Layer w0.254: U3.11 43.65,38.75 v2(44.3,38.1)
M2_ENC_A: J4.3 U2.27 | length 9.8
  Top Layer w0.254: U2.27 27.1,15.492 30.44,12.152 J4.3
M2_ENC_B: J4.4 U2.28 | length 7.5
  Top Layer w0.254: U2.28 27.9,15.85 J4.4
M2_PWM_A: U2.6 U3.5 | length 19.2
  Top Layer w0.254: U2.6 32.45,23.55 31.858,23.55 31.567,23.841 31.567,25.575 31.677,25.685 31.677,25.877 37.6,31.8 37.6,36.7 v2(36.8,37.5)
  Bottom Layer w0.254: U3.5 35.316,37.49 36.79,37.49 v2(36.8,37.5)
M2_PWM_B: U3.12 U8.9 | length 13.2
  Top Layer w0.254: v2(42.6,37.4) 42.6,38.442 43.312,39.154 44.846,39.154 47.744,36.256 48.373,36.256 49.825,34.804 U8.9
  Bottom Layer w0.254: U3.12 40.79,37.44 42.56,37.44 v2(42.6,37.4)
M3_DIR_A: U2.12 U4.4 | length 16.3
  Top Layer w0.254: U2.12 28.7,27.7 30.75,29.75 32.5,29.75 v2(32.75,29.5)
  Bottom Layer w0.254: v2(32.75,29.5) 32.75,24.5 33.5,23.75 35.308,23.75 36.538,22.52 U4.4
M3_DIR_B: U4.13 U9.10 | length 11.5
  Top Layer w0.254: v2(42.34,23.099) 42.34,24.34 43.621,25.621 43.621,25.93 43.77,26.079 48.579,26.079 49.425,25.233 U9.10
  Bottom Layer w0.254: v2(42.34,23.099) 42.34,22.624 U4.13
M3_ENC_A: J5.3 U2.30 | length 18.7
  Top Layer w0.254: U2.30 29.623,17.829 29.623,17.237 31.668,15.193 38.139,15.193 40.315,13.017 41.055,13.017 41.627,12.445 41.627,11.635 39.492,9.5 J5.3
M3_ENC_B: J5.4 U2.29 | length 14.7
  Top Layer w0.254: U2.29 28.823,17.829 28.823,17.237 31.322,14.739 37.951,14.739 J5.4
M3_PWM_A: U2.7 U4.3 | length 8.8
  Top Layer w0.254: U2.7 34.474,24.226 34.9,23.8 37.721,23.8 v2(38.131,23.39)
  Bottom Layer w0.254: U4.3 37.462,21.25 37.601,21.389 37.601,21.664 38.131,22.195 v2(38.131,23.39)
M3_PWM_B: U4.14 U9.9 | length 16.1
  Top Layer w0.254: v2(41,21.439) 41,24.1 43.5,26.6 48.7,26.6 49.923,25.377 49.923,23.902 U9.9
  Bottom Layer w0.254: v2(41,21.439) 41.053,21.439 41.217,21.275 42.419,21.275 U4.14
NetD1_1: D1.1 R1.2 | length 2
  Top Layer w0.254: D1.1 36.55,17.95 R1.2
NetD1_2: D1.2 U2.2 | length 6.4
  Top Layer w0.254: U2.2 32.697,20.103 33.289,20.103 34.5,18.892 34.5,17 34.9,16.6 D1.2
NetD2_1: D2.1 R2.2 | length 2.4
  Top Layer w0.5: D2.1 R2.2
NetD3_1: D3.1 R3.2 | length 2.4
  Top Layer w0.5: D3.1 R3.2
NetD4_1: D4.1 R4.2 | length 2.4
  Top Layer w0.5: D4.1 R4.2
NetD5_1: D5.1 R5.2 | length 2.4
  Top Layer w0.254: D5.1 R5.2
NetD6_1: D6.1 U7.1 | length 14.9
  Top Layer w0.254: v1(42.5,46.1) 44.7,48.3 D6.1 ; v1(48.6,40.7) 48.638,40.738 48.963,40.738 49.152,40.927 49.323,40.927 49.325,40.929 U7.1
  Bottom Layer w0.254: v1(42.5,46.1) 47.9,40.7 v1(48.6,40.7)
NetD6_2: D6.2 R6.1 | length 1.7
  Top Layer w0.254: D6.2 50.25,48.3 R6.1
NetD7_1: D7.1 U8.1 | length 6.1
  Top Layer w0.254: D7.1 46.752,28.902 47.889,28.902 49.325,30.338 U8.1
NetD7_2: D7.2 R12.1 | length 4.3
  Top Layer w0.254: R12.1 41.65,29.5 D7.2
NetD8_1: D8.1 U9.1 | length 6.2
  Top Layer w0.254: D8.1 48.05,17.341 47.923,17.468 47.923,18.81 49.425,20.312 U9.1
NetD8_2: D8.2 R18.1 | length 3.5
  Top Layer w0.254: R18.1 45.675,12.55 46.6,13.475 46.6,15.55 D8.2
NetP1_1: P1.1 Q1.1 Q1.2 Q1.3 | length 8.2
  Top Layer w1.4: P1.1 14.797,46.702 19.74,46.702 19.85,46.592 Q1.1 Q1.2 Q1.3
NetP2_1: P2.1 Q1.4 | length 5.6
  Top Layer w1.4: P2.1 19.75,42 20,42.25
NetP3_1: P3.1 U7.5 | length 8.6
  Top Layer w0.5: U7.5 51.6,40.564 51.864,40.3 58.95,40.3 P3.1@59,40.25
NetP4_1: P4.1 U7.7 | length 8.6
  Top Layer w0.5: U7.7 51.6,44.436 51.914,44.75 P4.1@59,44.75
NetP5_1: P5.1 U8.5 | length 8.6
  Top Layer w0.5: U8.5 51.6,30.564 51.864,30.3 58.95,30.3 P5.1@59,30.25
NetP6_1: P6.1 U8.7 | length 8.6
  Top Layer w0.5: U8.7 51.6,34.436 51.914,34.75 P6.1@59,34.75
NetP7_1: P7.1 U9.5 | length 8.6
  Top Layer w0.5: U9.5 51.7,20.564 51.964,20.3 58.7,20.3 P7.1@59,20
NetP8_1: P8.1 U9.7 | length 8.5
  Top Layer w0.5: U9.7 51.7,24.436 51.964,24.7 58.8,24.7 P8.1@59,24.5
NetR7_2: R7.2 U7.14 | length 2.5
  Top Layer w0.254: R7.2 47.65,41.15 48.25,41.75 U7.14
NetR8_2: R8.2 U7.13 | length 3
  Top Layer w0.254: R8.2 47.151,41.5 47.901,42.25 U7.13
NetR9_2: R9.2 U7.12 | length 3
  Top Layer w0.254: R9.2 47.151,43.5 47.901,42.75 U7.12
NetR10_2: R10.2 U7.11 | length 2.5
  Top Layer w0.254: R10.2 47.65,43.85 48.25,43.25 U7.11
NetR11_2: R11.2 U7.2 | length 3
  Top Layer w0.254: R11.2@49.05,38.4 49.05,38.475 49.825,39.25 U7.2
NetR13_2: R13.2 U8.14 | length 2.7
  Top Layer w0.254: R13.2 47.65,31.307 48.093,31.75 U8.14@48.9,31.75
NetR14_2: R14.2 U8.13 | length 3.1
  Top Layer w0.254: R14.2 47.201,31.5 47.951,32.25 U8.13@48.9,32.25
NetR15_2: R15.2 U8.12 | length 3.1
  Top Layer w0.254: R15.2 47.201,33.5 47.951,32.75 U8.12@48.9,32.75
NetR16_2: R16.2 U8.11 | length 2.7
  Top Layer w0.254: R16.2 47.65,33.693 48.093,33.25 U8.11@48.9,33.25
NetR17_2: R17.2 U8.2 | length 3.5
  Top Layer w0.254: R17.2 48.65,28.175 49.825,29.35 U8.2
NetR19_2: R19.2 U9.14 | length 2.6
  Top Layer w0.254: R19.2 47.65,21.15 48.25,21.75 U9.14
NetR20_2: R20.2 U9.13 | length 3.1
  Top Layer w0.254: R20.2 47.201,21.5 47.951,22.25 U9.13
NetR21_2: R21.2 U9.12 | length 3.1
  Top Layer w0.254: R21.2 47.201,23.5 47.951,22.75 U9.12
NetR22_2: R22.2 U9.11 | length 2.6
  Top Layer w0.254: R22.2 47.65,23.85 48.25,23.25 U9.11
NetR23_2: R23.2 U9.2 | length 3.1
  Top Layer w0.254: U9.2 49.925,19.427 50.15,19.202 R23.2
NRST: C5.2 J2.10 U2.4 | length 25.6
  Top Layer w0.254: v2(24.4,36.1) 24.453,36.1 24.643,36.29 J2.10@27.186,36.29 ; U2.4 34.649,21.826 C5.2 v2(34.75,23)
  Bottom Layer w0.254: v2(24.4,36.1) 24.4,33.8 29.75,28.45 29.75,24.75 31.5,23 v2(34.75,23)
SLEEP_n: U2.26 U4.5 | length 19.7
  Top Layer w0.254: U2.26 26.423,18.076 26.423,18.669 26.714,18.959 31.486,18.959 32.745,17.7 v2(33.5,17.7)
  Bottom Layer w0.254: v2(33.5,17.7) 34.847,19.047 34.847,19.347 36.157,20.657 37.863,20.657 38.7,21.493 38.7,23.882 38.551,24.03 37.702,24.03 37.462,23.79 U4.5
SLEEP_nB: U4.12 U7.3 U8.3 U9.3 | length 36.7
  Top Layer w0.23: U8.3 50.325,28.275 50.7,27.9 v2(51.2,27.9) ; U7.3 50.325,38.775 v2(51.1,38) ; U9.3 50.435,21.09 50.435,19.842 v2(50.477,19.8)
  Bottom Layer w0.254: U4.12 47.1,23.79 ; v2(50.477,19.8) 49.997,20.28 49.92,20.28 49.8,20.4 48.749,20.4 48.6,20.549 48.6,22.29 47.1,23.79 ; v2(51.1,38) 51.827,37.273 51.827,28.527 v2(51.2,27.9) 51.2,26.306 48.684,23.79 47.1,23.79
SWCLK: J2.4 U2.24 | length 19.4
  Top Layer w0.254: U2.24 24.063,19.463 26.213,19.463 v2(26.25,19.5) ; v2(24.75,32.5) 24.77,32.48 J2.4@27.186,32.48
  Bottom Layer w0.254: v2(24.75,32.5) 24.5,32.25 24.5,28.011 23.4,26.911 23.4,22.35 v2(26.25,19.5)
SWDIO: J2.2 U2.23 | length 16
  Top Layer w0.254: U2.23 25.726,20.226 v2(26.25,20.75) ; v2(25.052,31.25) 25.072,31.23 27.166,31.23 J2.2@27.186,31.21
  Bottom Layer w0.254: v2(25.052,31.25) 25.052,28.959 26.777,27.234 26.777,21.277 v2(26.25,20.75)
TRW_PWM: U2.8 U4.6 | length 4.4
  Top Layer w0.254: U2.8 v2(34.474,25.026)
  Bottom Layer w0.254: v2(34.474,25.026) 34.49,25.043 36.983,25.043 U4.6
TRW_PWM_B: J6.2 U4.11 | length 37.3
  Top Layer w0.5: v6(39.6,24.9) 39.623,24.877 39.623,16.588 42.204,14.007 42.204,10.396 44.4,8.2 55.216,8.2 56.06,9.044 56.06,9.956 55.31,10.706 55.31,11.12 J6.2
  Bottom Layer w0.5: v6(39.6,24.9) 41.822,24.9 41.982,25.06 U4.11
USB_N: J1.2 U1.4 U2.21 | length 10.3
  Top Layer w0.15: J1.2 15.8,19.525 16.338,19.525 16.363,19.5 18.534,19.5 19.209,20.175 19.225,20.175 19.45,20.4 U1.4 19.537,20.513 19.887,20.513 20.791,19.609 20.916,19.609 22.909,21.601 23.372,21.601 23.597,21.826 U2.21
USB_P: J1.3 U1.3 U2.22 | length 10.5
  Top Layer w0.15: J1.3 15.8,19.125 16.338,19.125 16.363,19.15 18.539,19.15 19.225,18.464 19.225,18.225 U1.3 19.675,18.225 20.027,18.225 23.054,21.251 23.372,21.251 23.597,21.026 U2.22
pads on no net: J1.4 J2.6 J2.7 J2.8 J3.drill J4.drill J5.drill J6.3 J6.4 J6.drill U1.1 U2.3 U2.9 U2.13 U2.20 U2.25 U2.31 U3.7 U3.10 U4.7 U4.10 U5.4 U6.4

## Polygon pours and split planes (outlines as drawn)
+16V on Bottom Layer "+16V_L04_P002" (solid, remove dead copper, pour order 2): 21,41.2 21,49.2 53.2,49.2 53.2,14.1 49.4,14.1 49.4,45.7 33.4,45.7 28.9,41.2
GND on Top Layer "NONET_L01_P007" (solid, remove dead copper, shelved, pour order 7): 11.8,8.3 43,8.3 43,9 41.7,10.3 41.8,10.4 41.8,13.4 39,16.2 39,23.1 37.5,24.6 37.8,24.9 37.8,33.7 32.75,38.75 32.7,38.7 11.7,38.7 11.7,8.4
GND on Top Layer "NONET_L01_P005" (solid, remove dead copper, shelved, pour order 5): 11.7,38.7 11.9,38.7 32.4,38.7 37.9,33.2 37.9,24.1 39.2,22.8 39.2,15.3 41.8,12.7 41.8,8.3 11.8,8.3 11.7,8.3
GNDB on Top Layer "NONET_L01_P006" (solid, remove dead copper, shelved, pour order 6): 11.9,49.5 11.9,39.5 33.1,39.5 38.2,34.4 38.2,24.2 39.7,22.7 39.7,15.6 39.8,15.6 43.5,11.9 43.5,8.3 61.1,8.3 61.1,49.5
GNDB on GND bottom "NONET_L03_P004" (solid, remove dead copper, shelved, pour order 4): 43.5,8.3 61.1,8.3 61.1,49.5 11.9,49.5 11.9,39.5 33.1,39.5 38.2,34.4 38.2,24.2 39.7,22.7 39.7,15.7 43.5,11.9 43.5,11.7
GND on GND top "NONET_L02_P003" (solid, remove dead copper, shelved, pour order 3): 11.7,38.8 32.3,38.8 37.8,33.3 37.8,24.2 39.2,22.8 39.2,15.7 39.6,15.3 43,11.9 43,8.3 11.7,8.3

## Text inside footprints (layer, text, board x,y; h text height)
U2: Top Overlay "*" at 31.3,20.226 h1.27 r180; Mechanical 13 "*" at 31.831,19.661 h1.27 r180
U3: Mechanical 13 "*" at 36.098,33.238 h1.27 r180; Bottom Overlay "*" at 36.528,33.345 h1.27 r180
U4: Mechanical 13 "*" at 37.792,19.548 h1.27 r180